# Altium PCB fader2_blind_vias_pcb.PcbDoc (part 3 of 3)
Units mil, origin at the board's own origin, x right, y up, seen from the top; angles counter-clockwise.
Board outline 6700 x 3900 mil, 6 copper layers (TOP, L2, L3, L4, L5, BOT), stack 48.468 mil thick; 207 components, 131 nets, 1413 pads, 920 vias.
Unrouted connection lines stored in the file: 31.
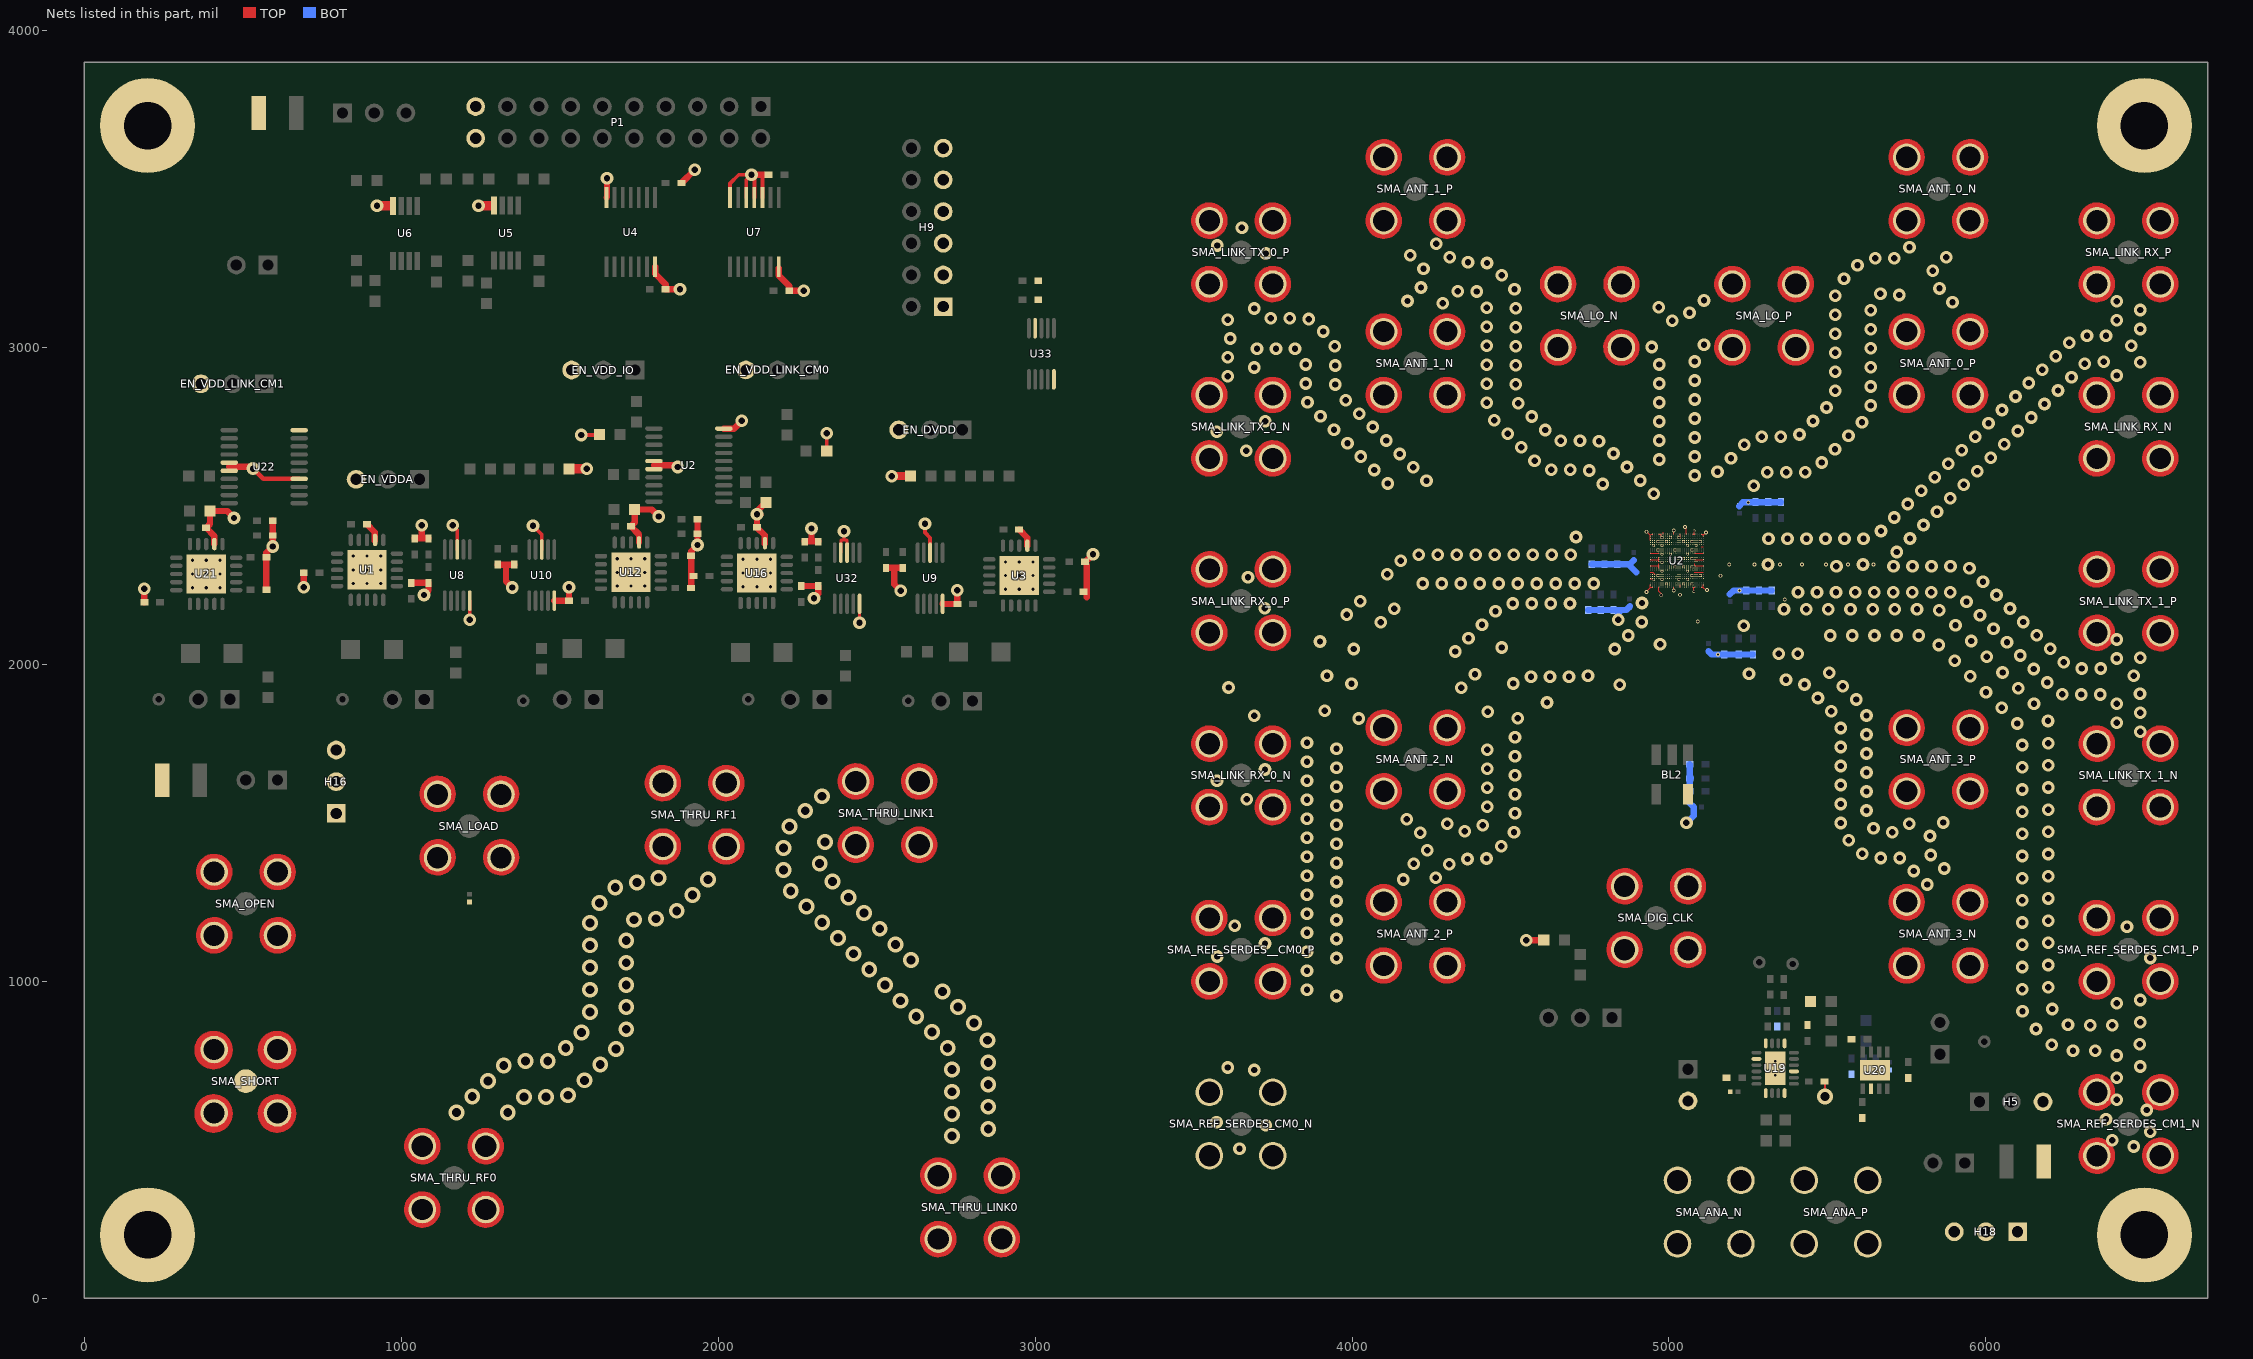
[diagram p7: the nets of this part, all layers, seen from the top]

## Via types
v1: diameter 40, hole 20, TOP to BOT, 478 vias
v2: diameter 40, hole 20, TOP to BOT, tented both sides, 111 vias
v3: diameter 50, hole 28, TOP to BOT, 71 vias
v4: diameter 8, hole 6, TOP to L2, 60 vias
v5: diameter 8, hole 6, L2 to L5, 60 vias
v6: diameter 8, hole 6, L5 to BOT, tented bottom, 53 vias
v7: diameter 20, hole 10, TOP to BOT, 45 vias
v8: diameter 12, hole 7, TOP to BOT, 29 vias
v9: diameter 8, hole 6, L5 to BOT, 7 vias
v10: diameter 20, hole 10, TOP to BOT, tented both sides, 4 vias
v11: diameter 19.68, hole 7.87, TOP to BOT, 2 vias

## Nets (pads, with @x,y where several pads share a name; then routed paths per layer and width w, separated by ;. In a path a pad name is that pad's centre, name@x,y a point inside that pad or via, vN(x,y) a via of type N, cw(c..) or ccw(c..) an arc to the next point about the centre after c; other vN are vias at no path point) (continued)
VSS: BL2.4 C1.2 C2.2 C3.2 C4.2 C5.2 C6.2 C8.2 C10.2 C13.2 C14.2 C17.2 C18.2 C19.2 C20.2 C21.2 C22.2 C23.2 C25.2 C26.2 C29.2 C30.2 C31.2 C32.2 C33.2 C34.2 C35.2 C36.2 C37.2 C38.2 C39.2 C40.2 C43.2 C46.2 C47.2 C48.2 C49.2 C50.2 C51.2 C52.2 C53.2 C62.2 C63.2 C64.2 C65.2 C66.2 C67.2 C69.2 C70.2 C71.2 C72.2 C73.2 C75.2 C76.2 C77.2 C78.2 C86.2 C87.2 C88.2 C89.2 C90.2 C91.2 C92.2 C95.2 C96.2 C98.2 C99.2 C100.2 C102.2 C103.2 C104.2 C105.2 C113.2 C114.2 C115.2 C116.2 C117.2 C118.2 EN_DVDD.3 EN_VDD_IO.3 EN_VDD_LINK_CM0.3 EN_VDD_LINK_CM1.3 EN_VDDA.3 H5.3 H9.1 H9.3 H9.5 H9.7 H9.9 H9.11 H13.2 H16.1 H16.2 H16.3 H18.1 H18.2 H18.3 P1.19 P1.20 pad.0 R1.1 R2.2 R5.1 R6.1 R23.2 R33.2 R40.1 R44.2 R51.2 R72.1 SMA_ANA_N.2 SMA_ANA_N.3 SMA_ANA_N.4 SMA_ANA_N.5 SMA_ANA_P.2 SMA_ANA_P.3 SMA_ANA_P.4 SMA_ANA_P.5 SMA_ANT_0_N.2 SMA_ANT_0_N.3 SMA_ANT_0_N.4 SMA_ANT_0_N.5 SMA_ANT_0_P.2 SMA_ANT_0_P.3 SMA_ANT_0_P.4 SMA_ANT_0_P.5 SMA_ANT_1_N.2 SMA_ANT_1_N.3 SMA_ANT_1_N.4 SMA_ANT_1_N.5 SMA_ANT_1_P.2 SMA_ANT_1_P.3 SMA_ANT_1_P.4 SMA_ANT_1_P.5 SMA_ANT_2_N.2 SMA_ANT_2_N.3 SMA_ANT_2_N.4 SMA_ANT_2_N.5 SMA_ANT_2_P.2 SMA_ANT_2_P.3 SMA_ANT_2_P.4 SMA_ANT_2_P.5 SMA_ANT_3_N.2 SMA_ANT_3_N.3 SMA_ANT_3_N.4 SMA_ANT_3_N.5 SMA_ANT_3_P.2 SMA_ANT_3_P.3 SMA_ANT_3_P.4 SMA_ANT_3_P.5 SMA_DIG_CLK.2 SMA_DIG_CLK.3 SMA_DIG_CLK.4 SMA_DIG_CLK.5 SMA_LINK_RX_0_N.2 SMA_LINK_RX_0_N.3 SMA_LINK_RX_0_N.4 SMA_LINK_RX_0_N.5 SMA_LINK_RX_0_P.2 SMA_LINK_RX_0_P.3 SMA_LINK_RX_0_P.4 SMA_LINK_RX_0_P.5 SMA_LINK_RX_N.2 SMA_LINK_RX_N.3 SMA_LINK_RX_N.4 SMA_LINK_RX_N.5 SMA_LINK_RX_P.2 SMA_LINK_RX_P.3 SMA_LINK_RX_P.4 SMA_LINK_RX_P.5 SMA_LINK_TX_0_N.2 SMA_LINK_TX_0_N.3 SMA_LINK_TX_0_N.4 SMA_LINK_TX_0_N.5 SMA_LINK_TX_0_P.2 SMA_LINK_TX_0_P.3 SMA_LINK_TX_0_P.4 SMA_LINK_TX_0_P.5 SMA_LINK_TX_1_N.2 SMA_LINK_TX_1_N.3 SMA_LINK_TX_1_N.4 SMA_LINK_TX_1_N.5 SMA_LINK_TX_1_P.2 SMA_LINK_TX_1_P.3 SMA_LINK_TX_1_P.4 SMA_LINK_TX_1_P.5 SMA_LO_N.2 SMA_LO_N.3 SMA_LO_N.4 SMA_LO_N.5 SMA_LO_P.2 SMA_LO_P.3 SMA_LO_P.4 SMA_LO_P.5 SMA_LOAD.2 SMA_LOAD.3 SMA_LOAD.4 SMA_LOAD.5 SMA_OPEN.2 SMA_OPEN.3 SMA_OPEN.4 SMA_OPEN.5 SMA_REF_SERDES__CM0_P.2 SMA_REF_SERDES__CM0_P.3 SMA_REF_SERDES__CM0_P.4 SMA_REF_SERDES__CM0_P.5 SMA_REF_SERDES_CM0_N.2 SMA_REF_SERDES_CM0_N.3 SMA_REF_SERDES_CM0_N.4 SMA_REF_SERDES_CM0_N.5 SMA_REF_SERDES_CM1_N.2 SMA_REF_SERDES_CM1_N.3 SMA_REF_SERDES_CM1_N.4 SMA_REF_SERDES_CM1_N.5 SMA_REF_SERDES_CM1_P.2 SMA_REF_SERDES_CM1_P.3 SMA_REF_SERDES_CM1_P.4 SMA_REF_SERDES_CM1_P.5 SMA_SHORT.1 SMA_SHORT.2 SMA_SHORT.3 SMA_SHORT.4 SMA_SHORT.5 SMA_THRU_LINK0.2 SMA_THRU_LINK0.3 SMA_THRU_LINK0.4 SMA_THRU_LINK0.5 SMA_THRU_LINK1.2 SMA_THRU_LINK1.3 SMA_THRU_LINK1.4 SMA_THRU_LINK1.5 SMA_THRU_RF0.2 SMA_THRU_RF0.3 SMA_THRU_RF0.4 SMA_THRU_RF0.5 SMA_THRU_RF1.2 SMA_THRU_RF1.3 SMA_THRU_RF1.4 SMA_THRU_RF1.5 U1.12 U1.21 U2.10 U2.15 U2.16 U2.A2 U2.A7 U2.A10 U2.A13 U2.A16 U2.A19 U2.A22 U2.A25 U2.AA1 U2.AA2 U2.AA3 U2.AA4 U2.AA5 U2.AA6 U2.AA7 U2.AA8 U2.AA9 U2.AA10 U2.AA11 U2.AA14 U2.AA15 U2.AA18 U2.AA19 U2.AA20 U2.AA21 U2.AA22 U2.AA23 U2.AA24 U2.AA25 U2.AB1 U2.AB4 U2.AB5 U2.AB6 U2.AB7 U2.AB8 U2.AB9 U2.AB10 U2.AB11 U2.AB12 U2.AB13 U2.AB14 U2.AB15 U2.AB16 U2.AB17 U2.AB18 U2.AB19 U2.AB20 U2.AB21 U2.AB22 U2.AB23 U2.AB26 U2.AC4 U2.AC5 U2.AC6 U2.AC7 U2.AC8 U2.AC9 U2.AC11 U2.AC12 U2.AC14 U2.AC15 U2.AC17 U2.AC18 U2.AC20 U2.AC21 U2.AC22 U2.AC23 U2.AD4 U2.AD5 U2.AD6 U2.AD7 U2.AD20 U2.AD21 U2.AD22 U2.AD23 U2.AE1 U2.AE4 U2.AE5 U2.AE6 U2.AE7 U2.AE20 U2.AE21 U2.AE22 U2.AE23 U2.AE26 U2.AF2 U2.AF3 U2.AF4 U2.AF5 U2.AF6 U2.AF7 U2.AF10 U2.AF13 U2.AF16 U2.AF19 U2.AF22 U2.AF25 U2.B1 U2.B4 U2.B5 U2.B6 U2.B7 U2.B20 U2.B21 U2.B26 U2.C4 U2.C5 U2.C6 U2.C7 U2.C20 U2.C21 U2.D4 U2.D5 U2.D6 U2.D7 U2.D8 U2.D9 U2.D11 U2.D12 U2.D14 U2.D15 U2.D17 U2.D18 U2.D20 U2.D21 U2.E1 U2.E4 U2.E5 U2.E6 U2.E7 U2.E8 U2.E9 U2.E10 U2.E11 U2.E12 U2.E13 U2.E14 U2.E15 U2.E16 U2.E17 U2.E18 U2.E19 U2.E20 U2.E21 U2.E26 U2.F1 U2.F4 U2.F5 U2.F6 U2.F7 U2.F8 U2.F9 U2.F10 U2.F11 U2.F12 U2.F13 U2.F16 U2.F17 U2.F18 U2.F19 U2.F20 U2.F21 U2.F22 U2.F23 U2.F24 U2.F25 U2.F26 U2.G4 U2.G5 U2.G6 U2.G7 U2.G8 U2.G9 U2.G10 U2.G11 U2.G12 U2.G13 U2.G16 U2.G17 U2.G18 U2.G19 U2.G20 U2.G21 U2.G22 U2.G23 U2.G24 U2.G25 U2.H4 U2.H5 U2.H6 U2.H7 U2.H10 U2.H11 U2.H12 U2.H13 U2.H16 U2.H17 U2.H18 U2.H19 U2.H22 U2.H23 U2.H24 U2.H25 U2.J1 U2.J4 U2.J5 U2.J6 U2.J7 U2.J10 U2.J11 U2.J12 U2.J13 U2.J16 U2.J17 U2.J18 U2.J19 U2.J22 U2.J23 U2.J24 U2.J25 U2.J26 U2.K2 U2.K3 U2.K4 U2.K5 U2.K12 U2.K13 U2.K16 U2.K17 U2.K22 U2.K23 U2.K24 U2.K25 U2.K26 U2.L2 U2.L3 U2.L4 U2.L5 U2.L12 U2.L13 U2.L16 U2.L17 U2.L22 U2.L23 U2.L24 U2.L25 U2.M1 U2.M2 U2.M3 U2.M4 U2.M5 U2.M8 U2.M9 U2.M12 U2.M13 U2.M16 U2.M17 U2.M20 U2.M21 U2.M22 U2.M23 U2.M24 U2.M25 U2.M26 U2.N2 U2.N3 U2.N4 U2.N5 U2.N8 U2.N9 U2.N12 U2.N13 U2.N16 U2.N17 U2.N20 U2.N21 U2.N22 U2.N23 U2.N24 U2.N25 U2.P8 U2.P9 U2.P10 U2.P11 U2.P16 U2.P17 U2.P21 U2.P22 U2.P24 U2.P25 U2.R1 U2.R8 U2.R9 U2.R10 U2.R11 U2.R16 U2.R17 U2.R26 U2.T2 U2.T3 U2.T5 U2.T6 U2.T10 U2.T11 U2.T16 U2.T17 U2.U2 U2.U3 U2.U4 U2.U5 U2.U6 U2.U7 U2.U10 U2.U11 U2.U16 U2.U17 U2.U22 U2.U23 U2.U24 U2.U25 U2.V1 U2.V2 U2.V3 U2.V4 U2.V5 U2.V6 U2.V7 U2.V10 U2.V11 U2.V14 U2.V15 U2.V18 U2.V19 U2.V22 U2.V23 U2.V24 U2.V25 U2.V26 U2.W1 U2.W2 U2.W3 U2.W4 U2.W5 U2.W6 U2.W7 U2.W10 U2.W11 U2.W14 U2.W15 U2.W18 U2.W19 U2.W22 U2.W23 U2.W24 U2.W25 U2.W26 U2.Y2 U2.Y3 U2.Y4 U2.Y5 U2.Y6 U2.Y7 U2.Y8 U2.Y9 U2.Y10 U2.Y11 U2.Y14 U2.Y15 U2.Y18 U2.Y19 U2.Y20 U2.Y21 U2.Y22 U2.Y23 U2.Y24 U2.Y25 U3.12 U3.21 U4.7 U4.14 U5.4 U6.4 U7.3 U7.4 U7.5 U7.7 U7.14 U8.5 U8.8 U9.5 U9.8 U10.5 U10.8 U12.12 U12.21 U16.12 U16.21 U19.3 U19.7 U19.10 U19.12 U19.17 U19.20 U19.21 U20.6 U20.9 U21.12 U21.21 U22.4 U22.10 U22.15 U22.16 U32.5 U32.8 U32.9 U33.5 U33.9 | length 39228.5
  TOP w3: 1265.1,325.06 1265.1,281.91 SMA_THRU_RF0.3@1266.91,280.1 ; 2849.94,385.1 SMA_THRU_LINK0.3@2893.09,385.1 ; 4298.19,1094.96 4298.19,1051.81 SMA_ANT_2_P.3@4300,1050 ; 4298.19,1644.96 4298.19,1601.81 SMA_ANT_2_N.3@4300,1600 ; 4298.19,2894.96 4298.19,2851.81 SMA_ANT_1_N.3@4300,2850 ; 4298.19,3444.96 4298.19,3401.81 SMA_ANT_1_P.3@4300,3400 ; 4848.19,3044.96 4848.19,3001.81 SMA_LO_N.3@4850,3000 ; v8(4928.93,2228.44) 4928.93,2229.97 4941.38,2242.42 ; v8(4929.35,2418.68) 4929.62,2418.68 4941.38,2406.91 ; U2.AF22@4941.38,2270.67 U2.AE22@4948.07,2270.67 ; U2.AF19@4941.38,2290.75 4948.07,2290.75 U2.AD20@4954.77,2284.05 ; U2.AF16@4941.38,2310.83 U2.AB16@4968.15,2310.83 ; U2.AF13@4941.38,2330.9 U2.AB13@4968.15,2330.9 ; U2.AF10@4941.38,2350.98 U2.AB10@4968.15,2350.98 ; U2.AF4@4941.38,2391.14 U2.AF3@4941.38,2397.83 U2.AF2@4941.38,2404.53 4941.38,2406.91 ; U2.AE26@4948.07,2243.9 4942.85,2243.9 4941.38,2242.42 ; U2.AE1@4948.07,2411.22 4945.68,2411.22 4941.38,2406.91 ; U2.AB26@4968.15,2243.9 4968.15,2231 4975.85,2223.31 v8(4975.85,2218.4) ; U2.AB17@4968.15,2304.13 U2.AB16@4968.15,2310.83 ; U2.AB15@4968.15,2317.52 U2.AB16@4968.15,2310.83 ; U2.AB14@4968.15,2324.21 U2.AB13@4968.15,2330.9 ; U2.AB12@4968.15,2337.6 U2.AB13@4968.15,2330.9 ; U2.AB1@4968.15,2411.22 U2.AA1@4974.84,2411.22 U2.AA2@4974.84,2404.53 ; v8(5015.03,2233.22) U2.R26@5015.03,2243.87 ; U2.R1@5015,2411.22 v8(5015.01,2422.69) ; U2.M26@5035.08,2243.89 U2.M25@5035.08,2250.59 ; U2.M3@5035.08,2397.83 U2.M2@5035.08,2404.53 U2.M1@5035.08,2411.22 ; v8(5050.7,2433.46) 5055.16,2429 U2.J1@5055.16,2411.22 ; U2.F26@5075.24,2244.21 5078.59,2244.21 ; U2.F1@5075.24,2411.22 5078.59,2411.22 ; v4@5078.59,2229.56 5078.59,2244.21 ; v4@5079,2421.25 v6(5079,2421) 5079,2411.63 5078.59,2411.22 ; 5079.52,2290.6 5079.67,2290.74 U2.E19@5081.93,2290.74 U2.A19@5108.7,2290.74 ; U2.E26@5081.93,2244.21 5078.59,2244.21 ; U2.E16@5081.93,2310.82 U2.E15@5081.93,2317.52 ; U2.E13@5081.93,2330.9 U2.A13@5108.7,2330.9 ; U2.E10@5081.93,2350.98 U2.A10@5108.7,2350.98 ; U2.E1@5081.93,2411.22 5078.59,2411.22 ; 5083.43,2310.82 U2.A16@5108.7,2310.82 ; U2.B26@5102.01,2243.89 5106.79,2243.89 5108.7,2241.98 ; U2.B7@5102.01,2371.06 U2.A7@5108.7,2371.06 ; U2.B1@5102.01,2411.22 5106.96,2411.22 ; U2.A25@5108.7,2250.59 5108.7,2241.98 ; U2.A2@5108.7,2404.53 5108.7,2409.47 5106.96,2411.22 ; v8(5116.85,2416.59) 5116.85,2416.17 5111.9,2411.22 5106.96,2411.22 ; v8(5120,2235) 5115.68,2235 5108.7,2241.98 ; 5398.19,3044.96 5398.19,3001.81 SMA_LO_P.3@5400,3000 ; 5948.19,1094.96 5948.19,1051.81 SMA_ANT_3_N.3@5950,1050 ; 5948.19,1644.96 5948.19,1601.81 SMA_ANT_3_P.3@5950,1600 ; 5948.19,2894.96 5948.19,2851.81 SMA_ANT_0_P.3@5950,2850 ; 5948.19,3444.96 5948.19,3401.81 SMA_ANT_0_N.3@5950,3400 ; 6548.19,1594.96 6548.19,1551.81 SMA_LINK_TX_1_N.3@6550,1550 ; 6548.19,2143.46 6548.19,2100.31 SMA_LINK_TX_1_P.3@6550,2098.5 ; 6548.19,2694.96 6548.19,2651.81 SMA_LINK_RX_N.3@6550,2650 ; 6548.19,3244.96 6548.19,3201.81 SMA_LINK_RX_P.3@6550,3200 ; 4941.38,2242.42 U2.AF25@4941.38,2250.59 ; 4941.38,2243.9 U2.AF25@4941.38,2250.59 ; 4941.38,2243.9 U2.AF25@4941.38,2250.59 ; 4941.38,2243.9 U2.AF25@4941.38,2250.59 ; 4941.38,2243.9 U2.AF25@4941.38,2250.59 ; 4941.38,2243.9 U2.AF25@4941.38,2250.59 ; 4941.38,2243.9 U2.AF25@4941.38,2250.59
  TOP w5.75: C75.2@5491.05,683.84 5492.05,684.84 v3(5492.05,637)
  TOP w10: v2(1216.31,2141.24) U8.5@1216.31,2201.24 ; U32.9@2387.25,2352.65 U32.9@2387.31,2352.71 2387.31,2392.24 2396.94,2392.24 ; v2(2396.94,2420.61) 2396.94,2392.24 ; 2406.57,2392.24 2396.94,2392.24 ; U32.8@2406.94,2352.65 2406.94,2391.87 ; v2(2446.31,2131.24) U32.5@2446.31,2191.24
  TOP w12: v2(1162.82,2438.83) 1176.99,2424.65 U8.8@1176.99,2362.71 ; v2(1415.82,2437.83) 1443.82,2409.83 U10.8@1443.82,2362.54 ; v2(1567.82,2723.83) 1624.82,2723.83 R6.1@1625.82,2724.83 ; U7.7@2037.64,3473.07 2037.64,3517.05 2065.26,3544.67 v2(2105.26,3544.67) ; U7.5@2088.82,3473.07 2088.82,3528.23 v2(2105.26,3544.67) ; U7.4@2114.41,3473.07 2114.41,3535.52 v2(2105.26,3544.67) ; U7.3@2140,3473.07 2140,3540.26 2144.41,3544.67 ; R40.1@2342.82,2673.83 v2(2342.82,2728.83) ; v2(2652.82,2443.83) 2652.82,2415.83 2668.82,2399.83 U9.8@2668.82,2352.54
  TOP w15: v2(532.82,2617.83) 565.2,2585.44 U22.4@678.05,2585.44
  TOP w20: C114.2@189.82,2195.83 v2(189.82,2238.83) ; U21.12@410.59,2379.8 410.59,2405.05 C96.2@384.82,2430.83 396.82,2442.83 R72.1@396.82,2483.83 450.82,2483.83 v2(472.82,2461.83) ; 457.58,2623.83 532.82,2623.83 v2(532.82,2617.83) ; C113.2@574.82,2235.83 C95.2@574.82,2337.83 574.82,2351.83 v2(594.82,2371.83) C64.2@594.82,2406.83 C63.2@594.82,2452.83 ; v2(692.82,2243.83) C2.2@692.82,2288.83 ; C62.2@892.31,2442.24 917.08,2417.46 U1.12@917.08,2390.24 ; C1.2@1032.31,2257.24 C40.2@1086.31,2257.24 1086.31,2233.24 v2(1072.31,2219.24) ; C46.2@1043.31,2398.24 1064.81,2398.24 ; v2(1064.81,2438.74) 1064.81,2398.24 ; C47.2@1086.31,2398.24 1064.81,2398.24 ; C26.2@1304.82,2314.83 1330.82,2314.83 ; v2(1350.82,2242.83) 1330.82,2262.83 1330.82,2314.83 ; C25.2@1356.82,2314.83 1330.82,2314.83 ; U10.5@1483.19,2201.12 1483.48,2200.83 C31.2@1529.82,2200.83 v2(1529.82,2243.83) ; U4.7@1647.64,3473.07 1649.41,3474.84 v2(1649.41,3533.82) ; U12.12@1750.59,2384.8 1750.59,2410.05 C43.2@1724.82,2435.83 1736.82,2447.83 R5.1@1736.82,2488.83 1790.82,2488.83 v2(1812.82,2466.83) ; 1797.58,2628.83 1872.82,2628.83 v2(1872.82,2622.83) ; U4.14@1801.18,3254.57 1801.18,3232.05 1834.41,3198.82 C14.2@1834.41,3183.82 v2(1879.98,3183.82) ; C13.2@1884.41,3518.82 v2(1926.41,3560.82) ; C29.2@1914.82,2240.83 C37.2@1914.82,2342.83 1914.82,2356.83 v2(1934.82,2376.83) C4.2@1934.82,2411.83 C3.2@1934.82,2457.83 ; U2.10@2018.05,2743.98 2049.98,2743.98 v2(2074.82,2768.83) ; v2(2105.26,3544.67) 2144.41,3544.67 ; C39.2@2122.31,2432.24 C39.2@2122.82,2431.72 ; v2@2132.82,2471.8 v2@2130.79,2473.83 ; U16.12@2147.08,2380.24 2147.08,2407.46 C39.2@2122.82,2431.72 ; R1.1@2150.82,2510.83 2122.31,2482.31 v2@2130.79,2473.83 ; U7.14@2191.18,3249.57 2191.18,3227.05 2224.41,3193.82 C66.2@2224.41,3178.82 v2(2269.98,3178.82) ; C32.2@2262.31,2247.24 C38.2@2316.31,2247.24 2316.31,2223.24 v2(2302.31,2209.24) ; C70.2@2273.31,2388.24 2294.81,2388.24 ; v2(2294.81,2428.74) 2294.81,2388.24 ; C71.2@2316.31,2388.24 2294.81,2388.24 ; C78.2@2529.82,2304.83 2555.82,2304.83 ; v2(2575.82,2232.83) 2555.82,2252.83 2555.82,2304.83 ; C69.2@2581.82,2304.83 2555.82,2304.83 ; U9.5@2708.19,2191.12 2708.48,2190.83 C104.2@2754.82,2190.83 v2(2754.82,2233.83) ; C102.2@2949.82,2425.83 2975.59,2400.05 U3.12@2975.59,2374.8 ; 3162.82,2211.83 C23.2@3162.82,2313.83 ; C23.2@3162.82,2327.83 v2(3182.82,2347.83) ; v2@4563,1130 R2.2@4605,1130 ; C39.2@2122.82,2431.72 v2(2122.82,2473.83) v2@2130.79,2473.83
  TOP w25: 1311.57,274.6 cw(c1266.91,280.1) 1265.1,325.06 cw(c1266.91,280.1) 1311.91,280.1 ; 1311.57,474.6 cw(c1266.91,480.1) 1264.93,435.14 cw(c1266.91,480.1) 1311.91,480.1 ; v2(2547.82,2593.83) R23.2@2606.82,2593.83 ; 2694.9,431.91 ccw(c2694.9,386.91) 2739.86,384.93 ccw(c2694.9,386.91) 2700.4,431.57 ; 2894.9,431.91 ccw(c2894.9,386.91) 2849.94,385.1 ccw(c2894.9,386.91) 2900.4,431.57 ; 4344.66,1044.5 cw(c4300,1050) 4298.19,1094.96 cw(c4300,1050) 4345,1050 ; 4344.66,1244.5 cw(c4300,1250) 4298.02,1205.04 cw(c4300,1250) 4345,1250 ; 4344.66,1594.5 cw(c4300,1600) 4298.19,1644.96 cw(c4300,1600) 4345,1600 ; 4344.66,1794.5 cw(c4300,1800) 4298.02,1755.04 cw(c4300,1800) 4345,1800 ; 4344.66,2844.5 cw(c4300,2850) 4298.19,2894.96 cw(c4300,2850) 4345,2850 ; 4344.66,3044.5 cw(c4300,3050) 4298.02,3005.04 cw(c4300,3050) 4345,3050 ; 4344.66,3394.5 cw(c4300,3400) 4298.19,3444.96 cw(c4300,3400) 4345,3400 ; 4344.66,3594.5 cw(c4300,3600) 4298.02,3555.04 cw(c4300,3600) 4345,3600 ; 4894.66,2994.5 cw(c4850,3000) 4848.19,3044.96 cw(c4850,3000) 4895,3000 ; 4894.66,3194.5 cw(c4850,3200) 4848.02,3155.04 cw(c4850,3200) 4895,3200 ; 5444.66,2994.5 cw(c5400,3000) 5398.19,3044.96 cw(c5400,3000) 5445,3000 ; 5444.66,3194.5 cw(c5400,3200) 5398.02,3155.04 cw(c5400,3200) 5445,3200 ; 5994.66,1044.5 cw(c5950,1050) 5948.19,1094.96 cw(c5950,1050) 5995,1050 ; 5994.66,1244.5 cw(c5950,1250) 5948.02,1205.04 cw(c5950,1250) 5995,1250 ; 5994.66,1594.5 cw(c5950,1600) 5948.19,1644.96 cw(c5950,1600) 5995,1600 ; 5994.66,1794.5 cw(c5950,1800) 5948.02,1755.04 cw(c5950,1800) 5995,1800 ; 5994.66,2844.5 cw(c5950,2850) 5948.19,2894.96 cw(c5950,2850) 5995,2850 ; 5994.66,3044.5 cw(c5950,3050) 5948.02,3005.04 cw(c5950,3050) 5995,3050 ; 5994.66,3394.5 cw(c5950,3400) 5948.19,3444.96 cw(c5950,3400) 5995,3400 ; 5994.66,3594.5 cw(c5950,3600) 5948.02,3555.04 cw(c5950,3600) 5995,3600 ; 6594.66,1544.5 cw(c6550,1550) 6548.19,1594.96 cw(c6550,1550) 6595,1550 ; 6594.66,2093 cw(c6550,2098.5) 6548.19,2143.46 cw(c6550,2098.5) 6595,2098.5 ; 6594.66,2644.5 cw(c6550,2650) 6548.19,2694.96 cw(c6550,2650) 6595,2650 ; 6594.66,3194.5 cw(c6550,3200) 6548.19,3244.96 cw(c6550,3200) 6595,3200 ; 6594.66,3394.5 cw(c6550,3400) 6548.02,3355.04 cw(c6550,3400) 6595,3400 ; 455.31,1145.14 ccw(c410.31,1145.14) 455.31,1145.14 ; 455.31,1345.14 ccw(c410.31,1345.14) 455.31,1345.14 ; 456.73,583.14 ccw(c408.31,583.14) 456.73,583.14 ; 456.73,783.14 ccw(c408.31,783.14) 456.73,783.14 ; 655.31,1145.14 ccw(c610.31,1145.14) 655.31,1145.14 ; 655.31,1345.14 ccw(c610.31,1345.14) 655.31,1345.14 ; 656.73,583.14 ccw(c608.31,583.14) 656.73,583.14 ; 656.73,783.14 ccw(c608.31,783.14) 656.73,783.14 ; 1111.57,274.6 ccw(c1066.91,280.1) 1111.91,280.1 ccw(c1066.91,280.1) 1111.57,274.6 ; 1111.91,480.1 ccw(c1066.91,480.1) 1111.91,480.1 ; 1160.31,1391.45 ccw(c1115.31,1391.45) 1160.31,1391.45 ; 1160.31,1591.45 ccw(c1115.31,1591.45) 1160.31,1591.45 ; 1360.31,1391.45 ccw(c1315.31,1391.45) 1360.31,1391.45 ; 1360.31,1591.45 ccw(c1315.31,1591.45) 1360.31,1591.45 ; 1829.92,1380.78 ccw(c1825.91,1425.6) 1870.57,1420.1 ccw(c1825.91,1425.6) 1870.91,1425.6 ccw(c1825.91,1425.6) 1829.92,1470.42 ccw(c1825.91,1425.6) 1829.92,1380.78 ; 1829.92,1580.78 cw(c1825.91,1625.6) 1829.92,1670.42 cw(c1825.91,1625.6) 1870.91,1625.6 cw(c1825.91,1625.6) 1829.92,1580.78 ; 1981.25,1420.1 cw(c2025.91,1425.6) 2070.91,1425.6 cw(c2025.91,1425.6) 1981.25,1420.1 ; 2070.91,1625.6 ccw(c2025.91,1625.6) 2070.91,1625.6 ; 2389.58,1434.92 ccw(c2434.4,1430.91) 2479.22,1434.92 ccw(c2434.4,1430.91) 2434.4,1475.91 ccw(c2434.4,1430.91) 2389.58,1434.92 ; 2479.4,1630.91 ccw(c2434.4,1630.91) 2479.4,1630.91 ; 2589.58,1434.92 ccw(c2634.4,1430.91) 2679.22,1434.92 ccw(c2634.4,1430.91) 2639.9,1475.57 ccw(c2634.4,1430.91) 2634.4,1475.91 ccw(c2634.4,1430.91) 2589.58,1434.92 ; 2634.4,1675.91 cw(c2634.4,1630.91) 2639.9,1586.25 cw(c2634.4,1630.91) 2634.4,1675.91 ; 2739.9,186.91 ccw(c2694.9,186.91) 2739.9,186.91 ; 2894.9,231.91 ccw(c2894.9,186.91) 2900.4,231.57 ccw(c2894.9,186.91) 2894.9,231.91 ; 3595,1000 ccw(c3550,1000) 3595,1000 ; 3595,1200 ccw(c3550,1200) 3595,1200 ; 3595,1550 ccw(c3550,1550) 3595,1550 ; 3595,1750 ccw(c3550,1750) 3595,1750 ; 3595,2100 ccw(c3550,2100) 3595,2100 ; 3595,2300 ccw(c3550,2300) 3595,2300 ; 3595,2650 ccw(c3550,2650) 3595,2650 ; 3595,2850 ccw(c3550,2850) 3595,2850 ; 3595,3200 ccw(c3550,3200) 3595,3200 ; 3595,3400 ccw(c3550,3400) 3595,3400 ; 3795,1000 ccw(c3750,1000) 3795,1000 ; 3795,1200 ccw(c3750,1200) 3795,1200 ; 3795,1550 ccw(c3750,1550) 3795,1550 ; 3795,1750 ccw(c3750,1750) 3795,1750 ; 3795,2100 ccw(c3750,2100) 3795,2100 ; 3795,2300 ccw(c3750,2300) 3795,2300 ; 3795,2650 ccw(c3750,2650) 3795,2650 ; 3795,2850 ccw(c3750,2850) 3795,2850 ; 3795,3200 ccw(c3750,3200) 3795,3200 ; 3795,3400 ccw(c3750,3400) 3795,3400 ; 4144.66,1044.5 ccw(c4100,1050) 4145,1050 ccw(c4100,1050) 4144.66,1044.5 ; 4144.66,1594.5 ccw(c4100,1600) 4145,1600 ccw(c4100,1600) 4144.66,1594.5 ; 4144.66,2844.5 ccw(c4100,2850) 4145,2850 ccw(c4100,2850) 4144.66,2844.5 ; 4144.66,3394.5 ccw(c4100,3400) 4145,3400 ccw(c4100,3400) 4144.66,3394.5 ; 4145,1250 ccw(c4100,1250) 4145,1250 ; 4145,1800 ccw(c4100,1800) 4145,1800 ; 4145,3050 ccw(c4100,3050) 4145,3050 ; 4145,3600 ccw(c4100,3600) 4145,3600 ; 4694.66,2994.5 ccw(c4650,3000) 4695,3000 ccw(c4650,3000) 4694.66,2994.5 ; 4695,3200 ccw(c4650,3200) 4695,3200 ; 4905,1100 ccw(c4860,1100) 4905,1100 ; 4905,1300 ccw(c4860,1300) 4905,1300 ; 5105,1100 ccw(c5060,1100) 5105,1100 ; 5105,1300 ccw(c5060,1300) 5105,1300 ; 5244.66,2994.5 ccw(c5200,3000) 5245,3000 ccw(c5200,3000) 5244.66,2994.5 ; 5245,3200 ccw(c5200,3200) 5245,3200 ; 5794.66,1044.5 ccw(c5750,1050) 5795,1050 ccw(c5750,1050) 5794.66,1044.5 ; 5794.66,1594.5 ccw(c5750,1600) 5795,1600 ccw(c5750,1600) 5794.66,1594.5 ; 5794.66,2844.5 ccw(c5750,2850) 5795,2850 ccw(c5750,2850) 5794.66,2844.5 ; 5794.66,3394.5 ccw(c5750,3400) 5795,3400 ccw(c5750,3400) 5794.66,3394.5 ; 5795,1250 ccw(c5750,1250) 5795,1250 ; 5795,1800 ccw(c5750,1800) 5795,1800 ; 5795,3050 ccw(c5750,3050) 5795,3050 ; 5795,3600 ccw(c5750,3600) 5795,3600 ; 6395,450 ccw(c6350,450) 6395,450 ; 6395,650 ccw(c6350,650) 6395,650 ; 6395,1000 ccw(c6350,1000) 6395,1000 ; 6395,1200 ccw(c6350,1200) 6395,1200 ; 6395,1550 ccw(c6350,1550) 6395,1550 ; 6395,1750 ccw(c6350,1750) 6395,1750 ; 6395,2100 ccw(c6350,2100) 6395,2100 ; 6395,2300 ccw(c6350,2300) 6395,2300 ; 6395,2650 ccw(c6350,2650) 6395,2650 ; 6395,2850 ccw(c6350,2850) 6395,2850 ; 6395,3200 ccw(c6350,3200) 6395,3200 ; 6395,3400 ccw(c6350,3400) 6395,3400 ; 6595,450 ccw(c6550,450) 6595,450 ; 6595,650 ccw(c6550,650) 6595,650 ; 6595,1000 ccw(c6550,1000) 6595,1000 ; 6595,1200 ccw(c6550,1200) 6595,1200 ; 6595,1750 ccw(c6550,1750) 6595,1750 ; 6595,2300 ccw(c6550,2300) 6595,2300 ; 6595,2850 ccw(c6550,2850) 6595,2850
  TOP w30: v2(923.94,3447.35) U6.4@965.33,3447.35 ; v2(1243.94,3447.35) U5.4@1285.33,3447.35 ; R33.2@1529.95,2616.97 v2(1585.95,2616.97)
  BOT w20: C19.2@4744.84,2171.78 4864.9,2171.78 C22.2@4876.84,2183.72 ; C48.2@4756.57,2316.53 4876.63,2316.53 C51.2@4888.57,2328.47 ; v1(4839.84,2141.22) 4839.84,2161.22 4849.84,2171.22 ; 4876.63,2311.33 4896.65,2291.3 ; v1(5055,1500) 5078,1523 C100.2@5078,1550 5065.5,1562.5 C98.2@5065.5,1600 C30.2@5065.5,1640 C99.2@5065.5,1685 ; C30.2@5068,1640 C30.2@5068.63,1640.63 ; C118.2@5124.84,2041.22 5134.84,2031.22 v8(5154.84,2031.22) C117.2@5174.84,2031.22 ; C117.2@5174.93,2031.14 C117.2@5174.84,2031.22 ; C103.2@5191.9,2221.22 5203.84,2233.16 v8(5222.12,2233.16) C34.2@5323.9,2233.16 ; C6.2@5221.18,2499.28 5233.12,2511.22 v8(5249.84,2511.22) C52.2@5353.18,2511.22 ; C115.2@5265.26,2031.14 5265.18,2031.22 C116.2@5219.84,2031.22 C117.2@5174.84,2031.22
  other v1: 3645.13,472.18 6466.04,478.91 6398.77,498.24 6518.53,525.22 3727.82,545.86 3572.21,555.54 6378.71,565.31 6507.71,594.37 6413.07,626.29 6413.07,696.29 3691.97,720.28 3608.03,728.48 6486.93,731.22 6413.07,766.29 6274.65,781.07 6344.65,781.07 6207.37,800.4 6484.87,801.19 6157.88,849.9 6328.86,861.93 6398.86,861.93 6258.88,863.34 6486.93,871.16 6115.38,905.52 6209.38,912.84 6413.07,930.47 6486.93,941.16 3950.97,953.72 3858.03,973.14 6115.07,975.52 6196.93,981.73 3858.03,1033.14 6115.07,1045.52 6196.93,1051.73 3950.97,1073.72 6517.98,1073.89 3575.16,1078.64 3858.03,1093.14 6115.07,1115.52 3725.33,1119.55 6196.93,1121.73 3950.97,1133.72 3858.03,1153.14 6445.11,1172.79 3629.54,1175.09 6115.07,1185.52 6196.93,1191.73 3950.97,1193.72 3858.03,1213.14 3950.97,1253.72 6115.07,1255.52 6196.93,1261.73 3858.03,1273.14 5814.45,1305.49 3950.97,1313.72 4161.62,1321.41 6115.07,1325.52 4264.33,1327.36 6196.93,1331.73 3858.03,1333.14 5772.16,1348.05 5868.36,1356.29 4306.76,1369.79 4195.14,1371.17 3950.97,1373.72 4364.5,1386.1 4424.48,1387.75 5668.42,1389.13 5728.42,1389.13 3858.03,1393.14 6115.07,1395.52 5825.93,1398.72 6196.93,1401.73 5610.04,1402.96 4237.57,1413.6 4470.47,1426.28 3950.97,1433.72 5567.61,1445.38 3858.03,1453.14 5823.31,1458.66 6115.07,1465.52 4214.85,1469.13 4510.84,1470.67 5704.23,1470.87 6196.93,1471.73 4355.56,1473.9 5645.49,1483.1 4412.59,1492.56 3950.97,1493.72 4300.13,1496.85 5757.9,1497.69 5541.56,1499.43 5865.74,1501.09 4172.53,1511.67 3858.03,1513.14 4514.37,1530.57 6115.07,1535.52 5623.3,1538.85 6196.93,1541.73 4426.58,1550.9 3950.97,1553.72 5541.56,1559.43 3858.03,1573.14 3667.66,1574.16 4514.37,1590.57 5623.3,1598.85 6115.07,1605.52 4426.58,1610.9 6196.93,1611.73 3950.97,1613.72 5541.56,1619.43 3573.94,1633.16 3858.03,1633.14 4514.37,1650.57 5623.3,1658.85 3725.6,1668.53 4426.58,1670.9 3950.97,1673.72 6115.07,1675.52 5541.56,1679.43 6196.93,1681.73 3858.03,1693.14 4514.37,1710.57 5623.3,1718.85 4426.58,1730.9 3950.97,1733.72 5541.56,1739.43 6115.07,1745.52 6196.93,1751.73 3858.03,1753.14 4514.37,1770.57 5623.3,1778.85 6486.93,1787.71 5541.56,1799.43 6099.1,1813.68 6413.07,1816.2 6196.06,1821.72 4020.85,1829.5 4522.97,1829.95 3691.97,1838.21 5623.3,1838.85 6486.93,1847.71 4427.86,1850.89 5512.33,1851.83 3913.73,1854.08 6049.61,1863.17 6151.51,1875.71 6413.07,1876.2 4615,1880 5590.6,1889.16 5469.9,1894.25 6300.54,1905.18 6360.54,1905.18 6240.54,1905.91 6485.91,1907.7 6000.11,1912.67 6102.01,1925.21 3610.55,1927.37 4345.01,1926.86 5548.17,1931.58 4844.66,1936.16 5427.47,1936.68 3998.58,1938.93 4508.47,1939.6 6193.49,1943.13 5369.42,1951.86 4564.54,1960.95 4624.54,1960.95 4684.54,1960.95 5950.61,1962.17 3921.1,1963.75 4744.47,1963.97 6466.79,1964.57 4388.03,1968.68 5252.37,1970.41 5505.75,1974.01 6052.51,1974.71 6151.06,1985.56 6302.11,1986.93 6362.11,1986.93 6245.47,2006.75 5901.11,2011.67 6413.07,2018.58 6486.93,2021.1 6003.01,2024.21 6108.63,2027.99 5345.83,2033.6 5405.83,2033.6 4325.26,2040.61 4005.96,2048.6 4829.32,2048.82 6203.05,2049.17 4472.89,2053.53 5851.62,2061.16 4971.94,2063.44 6066.21,2070.41 3899.01,2072.37 5953.52,2073.7 6413.07,2078.58 4367.68,2083.04 4871.74,2091.24 5508.33,2091.07 5578.33,2091.07 5648.33,2091.07 5718.33,2091.07 5788.33,2091.07 6160.62,2091.6 6023.78,2112.84 5235.61,2122.17 5904.02,2123.2 4410.11,2125.46 4090.81,2133.46 4914.17,2133.67 6118.2,2134.02 5981.35,2155.27 3983.87,2157.22 4452.54,2167.89 5852.66,2170.76 5362.73,2173.93 5432.73,2173.93 5502.73,2173.93 5572.73,2173.93 5642.73,2173.93 5712.73,2173.93 5782.73,2173.93 4133.24,2175.88 3724.45,2177.16 6075.77,2176.45 4507.49,2191.97 4567.49,2191.97 4627.49,2191.97 4687.49,2191.97 4914.81,2193.67 5938.93,2197.69 4026.29,2199.65 6033.34,2218.88 5407.19,2228.07 5467.19,2228.07 5527.19,2228.07 5587.19,2228.07 5647.19,2228.07 5707.19,2228.07 5767.19,2228.07 5827.19,2228.07 5887.19,2228.07 4222.77,2255.47 4282.77,2255.47 4342.77,2255.47 4402.77,2255.47 4462.77,2255.47 4522.77,2255.47 4582.77,2255.47 4642.77,2255.47 4702.77,2255.47 4762.77,2255.47 5990.92,2261.3 3671.99,2274.68 4111.14,2284.5 5947.89,2303.12 5528.26,2309.82 5708.26,2309.82 5768.26,2309.82 5828.26,2309.82 5888.26,2309.82 5312.23,2315.1 5612.23,2315.1 4153.57,2326.92 4210.42,2346.1 4270.42,2346.1 4330.42,2346.1 4390.42,2346.1 4450.42,2346.1 4510.42,2346.1 4570.42,2346.1 4630.42,2346.1 4690.42,2346.1 5718.2,2354.83 5313.88,2396.84 5373.88,2396.84 5433.88,2396.84 5493.88,2396.84 5553.88,2396.84 5613.88,2396.84 5760.63,2397.25 4706.68,2401.96 5668.79,2421.01 5803.06,2439.68 5711.22,2463.44 5845.48,2482.11 5753.65,2505.87 5887.91,2524.53 4952.2,2538.06 5796.07,2548.29 5267.37,2563.96 5930.34,2566.96 4790.99,2569.41 4112.8,2570.85 4235.17,2579.12 4909.78,2580.48 5838.5,2590.72 5081,2595.87 5309.91,2606.27 5369.91,2606.27 5429.91,2606.33 5153.12,2608.11 5972.76,2609.38 4748.56,2611.83 4070.37,2613.28 4628.61,2614.19 4688.61,2614.19 4192.74,2621.54 4867.35,2622.91 5880.92,2633.15 5481.59,2636.81 4575.99,2643.03 4969,2646.35 5195.55,2650.54 6015.19,2651.81 4027.94,2655.7 5081,2655.87 4150.32,2663.97 4824.92,2665.34 3666.34,2673.81 5923.35,2675.57 5524.01,2679.24 4533.56,2685.46 5237.97,2692.96 6057.62,2694.24 3985.52,2698.13 4778.99,2703.94 4107.89,2706.4 4659.03,2706.02 4719.03,2706.02 4969,2706.35 5081,2715.87 5292.37,2718.27 5352.37,2718.27 5965.78,2718 5566.44,2721.67 5411.93,2725.55 4491.14,2727.88 3573.62,2734.38 6100.04,2736.66 4609.3,2739.59 3943.09,2740.56 4065.46,2748.82 6008.2,2760.42 5608.87,2764.09 4969,2766.35 3725.98,2767.12 5454.36,2767.97 4448.71,2770.31 5081,2775.87 6142.47,2779.09 4566.87,2782.01 3900.67,2782.98 4023.04,2791.25 6050.63,2802.85 5496.78,2810.4 5637.05,2817.06 6184.9,2821.52 4424.73,2825.31 4524.44,2824.44 4969,2826.35 3859.51,2826.65 3980.61,2833.68 5081,2835.87 6093.06,2845.28 5525.05,2863.32 6227.32,2863.94 5637.05,2877.06 3946.9,2883.31 4516.56,2883.92 4424.73,2885.31 3854.03,2886.4 4969,2886.35 6135.48,2887.7 5081,2895.87 6269.75,2906.37 3608.03,2908.72 6413.07,2911.6 5525.05,2923.32 6177.91,2930.13 3691.97,2936.55 5637.05,2937.06 3946.9,2943.31 4516.56,2943.92 4424.73,2945.31 3854.03,2946.4 4969,2946.35 6312.17,2948.8 6486.62,2953.07 6371.83,2955.18 5081,2955.87 3608.03,2968.72 6220.34,2972.56 5525.05,2983.32 3700.32,2995.97 3760.32,2996.03 3820.32,2996.03 5637.05,2997.06 4945.77,3001.67 3945.82,3003.3 4516.56,3003.92 4424.73,3005.31 6458.05,3005.83 5110.62,3008.05 6262.76,3014.98 3615.4,3028.27 6318.61,3036.93 6378.61,3036.93 5525.05,3043.32 3908.82,3050.54 5637.05,3057.06 6486.93,3058.42 4516.56,3063.92 4424.73,3065.31 5010.17,3084.5 6413.07,3086.04 3608.06,3087.81 3863.19,3089.5 3743.24,3091.97 3803.24,3091.97 5525.05,3103.32 5064.75,3109.42 5637.05,3117.06 6486.93,3118.42 3691.97,3123.13 4516.56,3123.92 4424.73,3125.31 4967.75,3126.92 4286.68,3139.51 5894.61,3142.69 6413.07,3146.04 4175.07,3146.61 5110.36,3148.41 5525.05,3163.32 5726.98,3165.45 5667.09,3169 4333.59,3176.92 4393.59,3176.59 4512.38,3183.77 5853.39,3186.28 4217.49,3189.04 5552.1,3216.88 4471.94,3228.1 5832.02,3242.35 4225.64,3248.48 5594.53,3259.31 4426,3266.69 4366.04,3268.75 5650.47,3281 5710.47,3281 4308.18,3284.65 5874.45,3284.78 4183.22,3290.91 3727.82,3296.53 5758.88,3316.45 3575.2,3321.53 4265.76,3327.07 3652.62,3377.82
  other v2: 4550,1130
  other v3: 2738.15,511.63 2852.34,534.41 2738.15,581.63 1174.99,586.8 1336.33,586.65 2852.34,604.41 1387.21,634.72 1457.21,634.72 1224.49,636.3 1526.95,640.83 2738.15,651.63 2852.34,674.41 1273.98,685.8 1578.85,687.79 2738.15,721.63 1323.82,734.96 1628.35,737.29 2852.34,744.41 1392.41,748.92 1462.41,748.92 1677.85,786.79 1519.29,789.73 2724.31,790.25 2850.46,814.38 1568.78,839.22 2674.81,839.75 1710.12,848.91 2806.89,869.17 2625.31,889.24 1595.92,903.75 1710.12,918.91 2757.39,918.67 2575.82,938.74 2707.89,968.16 1595.92,973.75 2526.32,988.24 1710.12,988.91 2476.82,1037.74 1595.92,1043.75 1710.12,1058.91 2608.9,1067.16 2427.32,1087.23 1595.92,1113.75 2559.4,1116.66 1710.12,1128.91 2377.83,1136.73 2509.9,1166.15 1595.92,1183.75 2328.33,1186.23 1734.44,1194.54 1804.38,1197.45 2460.41,1215.65 1869.71,1222.6 2278.83,1235.73 1625.56,1247.16 2410.91,1265.15 1919.21,1272.09 2229.34,1285.22 1675.29,1296.43 1743.62,1311.64 2361.41,1314.65 1968.38,1321.91 1812.04,1326.42 2206.25,1351.31 2320.44,1371.4 2206.25,1421.31 2337.48,1439.3 2225.34,1488.65 2274.84,1538.15 2327.77,1583.96
  other v4: 5078.5,2229.5 4991.5,2254 5045,2254 5072,2254 4951.5,2267.5 4978,2267.5 5031.5,2267.5 5058.5,2267.5 4965,2280.5 5072,2280.5 5098.5,2280.5 4978,2294 5058.5,2294 5018.5,2307.5 5045,2307.5 5072,2307.5 4978,2321 5045,2334.5 5072,2334.5 4978,2347.5 5005,2347.5 5058.5,2347.5 4965,2361 5018.5,2361 5072,2361 4951.5,2374.5 4978,2374.5 5058.5,2374.5 5085.5,2374.5 4965,2388 4991.5,2388 5045,2388 5072,2388 5098.5,2388 4978,2401 5005,2401 5031.5,2401 5079,2421
  other v5: 5078.5,2229.5 4991.5,2254 5045,2254 5072,2254 4951.5,2267.5 4978,2267.5 5031.5,2267.5 5058.5,2267.5 4965,2280.5 5072,2280.5 5098.5,2280.5 4978,2294 5058.5,2294 5018.5,2307.5 5045,2307.5 5072,2307.5 4978,2321 5045,2334.5 5072,2334.5 4978,2347.5 5005,2347.5 5058.5,2347.5 4965,2361 5018.5,2361 5072,2361 4951.5,2374.5 4978,2374.5 5058.5,2374.5 5085.5,2374.5 4965,2388 4991.5,2388 5045,2388 5072,2388 5098.5,2388 4978,2401 5005,2401 5031.5,2401 5079,2421
  other v6: 5078.5,2229.5 4991.5,2254 5045,2254 5072,2254 4951.5,2267.5 4978,2267.5 5058.5,2267.5 4965,2280.5 5072,2280.5 5098.5,2280.5 4978,2294 5058.5,2294 5018.5,2307.5 5045,2307.5 5072,2307.5 4978,2321 5045,2334.5 5072,2334.5 4978,2347.5 5005,2347.5 5058.5,2347.5 4965,2361 5018.5,2361 5072,2361 4978,2374.5 5058.5,2374.5 5085.5,2374.5 4965,2388 4991.5,2388 5045,2388 5072,2388 5098.5,2388
  other v7: 2906.69,2237.01 2950,2237.01 2993.31,2237.01 341.69,2242.01 385,2242.01 428.31,2242.01 2079,2244.93 2122.31,2244.93 2165.61,2244.93 1681.69,2247.01 1725,2247.01 1768.31,2247.01 849,2254.93 892.31,2254.93 935.61,2254.93 2906.69,2280.31 2950,2280.31 2993.31,2280.31 341.69,2285.31 385,2285.31 428.31,2285.31 2079,2288.24 2122.31,2288.24 2165.61,2288.24 1681.69,2290.31 1725,2290.31 1768.31,2290.31 849,2298.24 892.31,2298.24 935.61,2298.24 2906.69,2323.62 2950,2323.62 2993.31,2323.62 341.69,2328.62 385,2328.62 428.31,2328.62 2079,2331.54 2122.31,2331.54 2165.61,2331.54 1681.69,2333.62 1725,2333.62 1768.31,2333.62 849,2341.54 892.31,2341.54 935.61,2341.54
  other v8: 5091,2135 5365,2205 5035,2220 5162.46,2279.5 5190,2315 5270,2315 5350,2315 5420,2315 5495,2315 5565,2315 5645,2315
  other v9: 5031.5,2267.5 4951.5,2374.5 4978,2401 5005,2401 5031.5,2401
  other v11: 5335.05,704.19 5335.05,747.5
Y1: U2.Y1 | length 5.9
  TOP w3: U2.Y1@4981.54,2411.22 4981.54,2417.11
pads on no net: H9.10 H19.3 P1.3 P1.5 P1.7 P1.9 P1.11 P1.13 P1.14 SMA_OPEN.1 U1.2 U1.3 U1.4 U1.9 U1.13 U1.14 U1.17 U2.AD14 U2.AD15 U2.AD17 U2.AD18 U2.AE14 U2.AE15 U2.AE17 U2.AE18 U2.B17 U2.B18 U2.C17 U2.C18 U3.2 U3.3 U3.4 U3.9 U3.13 U3.14 U3.17 U4.6 U4.9 U7.6 U7.8 U7.9 U7.10 U7.11 U8.1 U8.4 U9.1 U9.4 U10.1 U10.4 U12.2 U12.3 U12.4 U12.9 U12.13 U12.14 U12.17 U16.2 U16.3 U16.4 U16.9 U16.13 U16.14 U16.17 U19.4 U19.13 U19.14 U20.7 U21.2 U21.3 U21.4 U21.9 U21.13 U21.14 U21.17 U22.1 U22.2 U22.3 U22.6 U22.7 U22.8 U22.11 U22.12 U22.13 U32.1 U32.4 U33.1 U33.4
copper on no net: | length 41.3
  TOP w20: 932.82,2084.14 932.82,2097.18 952.82,2117.18
  other v5: 5098.5,2300.5
  other v6: 5098.5,2300.5

## Polygon pours and split planes (outlines as drawn)
VSS on BOT "BOT-GND" (solid, remove dead copper, pour order 20): 0,0 6669,0 6669,3900 0,3900
VSS on TOP "TOP-GND" (solid, remove dead copper, pour order 24): 39.37,0 6650,0 6650,3900 39.37,3900
VSS on L5 "L5" (solid, remove dead copper, pour order 34): 0,0 6667,0 6667,3900 0,3900
VSS on L2 "L2" (solid, remove dead copper, pour order 32): 0,0 6700,0 6700,3900 0,3900
VDDA on L3 (split plane): 3470,2435 3470.12,2434.41 3470.45,2433.92 3470.94,2433.59 3471.53,2433.47 5111.2,2433.47 5111.2,2391.68 4911.57,2391.68 4910.98,2391.57 4910.49,2391.24 4910.15,2390.74 4910.04,2390.16 4910.04,2273.8 4910.15,2273.21 4910.49,2272.72 4910.98,2272.39 4911.57,2272.27 5114.15,2272.27 5114.15,2232.81 3471.53,2232.81 3470.94,2232.69 3470.45,2232.36 3470.12,2231.87 3470,2231.28 3470,1936.53 1396.53,1936.53 1396.53,2023.47 3235,2023.47 3235.59,2023.59 3236.08,2023.92 3236.41,2024.41 3236.53,2025 3236.53,2850 3236.41,2850.59 3236.08,2851.08 3235.59,2851.41 3235,2851.53 1663.06,2851.53 1663.06,3218.47 1840,3218.47 1840,3030 1840.12,3029.41 1840.45,3028.92 1840.94,3028.59 1841.53,3028.47 2206.53,3028.47 2207.11,3028.59 2207.61,3028.92 2207.94,3029.41 2208.06,3030 2208.06,3603.47 3470,3603.47
VDD_SCAN_FPGA on L3 (split plane): 2157.88,3100.27 2015.94,3100.27 2015.94,3398.74 2015.82,3399.32 2015.49,3399.82 2014.99,3400.15 2014.41,3400.27 741.53,3400.27 741.53,3788.47 2157.88,3788.47
VDDA on L3 (split plane): 5318.47,1801.53 1111.53,1801.53 1111.53,1888.47 5184.84,1888.47 5185.43,1888.59 5185.93,1888.92 5186.26,1889.41 5186.37,1890 5186.37,2296.43 5186.26,2297.02 5185.93,2297.52 5185.43,2297.85 5184.84,2297.96 5184.64,2297.92 5184.44,2297.96 4979.82,2297.96 4979.82,2360.11 5184.47,2360.11 5185.05,2360.22 5185.55,2360.55 5185.88,2361.05 5186,2361.64 5186,2453.47 5318.47,2453.47
VDD_IN on L3 (split plane): 3158.47,2086.53 855,2086.53 854.41,2086.41 853.92,2086.08 853.59,2085.59 853.47,2085 853.47,1016.24 853.59,1015.65 853.92,1015.16 854.41,1014.83 855,1014.71 5113.47,1014.71 5113.47,356.53 2851.09,356.53 2837.11,365.87 2820.89,372.59 2803.68,376.02 2786.12,376.02 2768.91,372.59 2752.69,365.87 2738.7,356.53 1253.07,356.53 1256.02,371.32 1256.02,380.1 1256.02,388.88 1252.59,406.09 1245.87,422.31 1236.12,436.9 1223.71,449.31 1209.12,459.07 1192.9,465.78 1175.69,469.21 1158.13,469.21 1140.92,465.78 1124.7,459.07 1110.11,449.31 1097.7,436.9 1087.94,422.31 1081.23,406.09 1077.8,388.88 1077.8,380.1 1077.8,371.32 1080.75,356.53 416.53,356.53 416.53,2473.47 3158.47,2473.47
VDDA on L3 (split plane): 6679.9,20.1 20.1,20.1 20.1,3879.9 6679.9,3879.9
VDD_LINK_CM1 on L4 (split plane): 5212.72,1911.53 2436.53,1911.53 2436.53,1983.47 5119.06,1983.47 5119.65,1983.59 5120.14,1983.92 5120.47,1984.41 5120.59,1985 5120.59,2290.38 5120.47,2290.96 5120.14,2291.46 5119.65,2291.79 5119.06,2291.91 5087.79,2291.91 5087.79,2307.96 5212.72,2307.96
VDD_LINK_CM1 on L4 (split plane): 5069.57,2276.47 5069.69,2275.89 5070.02,2275.39 5070.52,2275.06 5071.1,2274.94 5097.58,2274.94 5097.58,2259.53 5071.79,2259.53 5071.2,2259.41 5070.71,2259.08 5070.37,2258.59 5070.26,2258 5070.26,2016.53 2495.94,2016.53 2495.94,2103.47 4829.25,2103.47 4829.84,2103.59 4830.34,2103.92 4830.67,2104.41 4830.78,2105 4830.78,2416.11 5069.57,2416.11
VDD_LINK_CM1 on L4 (split plane): 5447.88,1796.53 526.53,1796.53 526.53,1873.47 5304.25,1873.47 5304.84,1873.59 5305.34,1873.92 5305.67,1874.41 5305.78,1875 5305.78,2134.69 5447.88,2134.69
VDD_FPGA_3P3V on L4 (split plane): 3133.47,2236.53 426.53,2236.53 426.53,3838.47 3133.47,3838.47
VDD_LINK_CM1 on L4 (split plane): 6679.9,20.1 20.1,20.1 20.1,3879.9 6679.9,3879.9

## Other copper
TOP:
  rectangle net NetU2_R24: 5007.07,2249.12 5016.24,2258.57
  rectangle net VSS: 4973.61,2249.29 5002.91,2262.99
  rectangle net VSS: 4986.84,2242.59 4996.24,2252.04
  rectangle net VSS: 4960.2,2336.15 4969.46,2345.6
  rectangle net VSS: 4960.21,2296.16 4969.47,2305.56
  rectangle net VSS: 4966.96,2281.65 4982.78,2291.05
  rectangle net VDDA: 5000.34,2325.49 5022.94,2338.96
  rectangle net DVDD: 4986.96,2276.02 5002.91,2285.47
  rectangle net DVDD: 4973.4,2302.81 4996.23,2312.25
  rectangle net DVDD: 4973.4,2329.66 4996.23,2339.11
  rectangle net VSS: 4966.93,2289.27 4996.17,2298.72
  rectangle net VSS: 4960.21,2316.13 4996.2,2325.58
  rectangle net VSS: 4960.21,2356.21 4983.04,2369.98
  rectangle net VSS: 5002.05,2376.41 5009.57,2385.86
  rectangle net NetU2_P2: 5013.68,2396.44 5023.03,2405.89
  rectangle net NetU2_P5: 5013.6,2376.29 5022.96,2385.74
  rectangle net VSS: 4973.57,2388.72 5002.89,2398.13
  rectangle net VSS: 4986.82,2403.02 4996.22,2412.46
  rectangle net VSS: 4973.57,2396.39 5009.57,2405.84
  rectangle net DVDD: 4986.75,2356.38 5009.59,2365.82
  rectangle net VSS: 5047.09,2242.61 5056.49,2252.06
  rectangle net VDD_IO: 5080.48,2249.15 5103.32,2258.6
  rectangle net DVDD: 5040.38,2284.53 5049.78,2293.98
  rectangle net DVDD: 5040.4,2275.89 5063.23,2285.34
  rectangle net VSS: 5083.17,2336.35 5089.89,2345.54
  rectangle net VSS: 5080.67,2316.07 5089.85,2325.52
  rectangle net VSS: 5080.73,2296.01 5089.91,2305.46
  rectangle net VDD_LINK_CM1: 5094.1,2316.27 5103.27,2325.72
  rectangle net VDD_LINK_CM1: 5094.06,2295.93 5103.23,2305.38
  rectangle net VSS: 5083.22,2276.11 5103.42,2285.36
  rectangle net DVDD: 5053.75,2316.05 5076.59,2325.49
  rectangle net VSS: 5053.89,2289.38 5083.23,2303.38
  rectangle net VSS: 5067.23,2276.11 5083.25,2290.1
  rectangle net VSS: 5067.24,2271.24 5076.58,2281.35
  rectangle net DVDD: 5040.32,2365.35 5049.88,2374.8
  rectangle net DVDD: 5040.32,2356.14 5063.16,2365.59
  rectangle net VDD_IO: 5080.69,2396.44 5103.53,2405.89
  rectangle net DVDD: 5053.68,2396.5 5076.51,2405.95
  rectangle net VSS: 5067,2356.32 5089.84,2369.74
  rectangle net VSS: 5053.91,2369.72 5103.39,2383.36
  rectangle net VSS: 4966.87,2348.89 4983.07,2362.66
  rectangle net NetU2_R21: 5007,2269.29 5016.17,2278.74
  rectangle net VSS: 5013.53,2349.34 5022.97,2358.83
  rectangle net VSS: 4966.86,2342.82 5022.97,2352.27
  rectangle net VSS: 5053.92,2329.5 5067.21,2352.25
  rectangle net DVDD: 5080.47,2262.66 5103.3,2272.11
  rectangle net VSS: 5067,2329.52 5083.2,2356.39
  rectangle net VDD_IO: 4946.62,2249.12 4969.45,2258.57
  rectangle net VSS: 5020.31,2249.3 5076.58,2258.55
  rectangle net NetU2_AD11: 4940.14,2336.16 4956.05,2345.61
  rectangle net VDD_LINK_CM0: 4946.81,2316.09 4955.98,2325.54
  rectangle net VDD_LINK_CM0: 4946.82,2296.12 4956.05,2305.56
  rectangle net VSS: 4946.43,2271.07 4982.79,2285.45
  rectangle net VSS: 5027.17,2275.85 5036.4,2285.3
  rectangle net VSS: 5027.14,2329.62 5054.06,2338.82
  rectangle net VDDA: 5000.34,2316.1 5049.8,2325.55
  rectangle net DVDD: 5000.37,2289.42 5049.78,2298.87
  rectangle net NetU2_A11: 5094.07,2336.12 5109.98,2345.57
  rectangle net VSS: 5000.35,2302.88 5083.24,2312.32
  rectangle net VDD_IO: 4946.66,2396.39 4969.5,2405.84
  rectangle net NetU2_AD8: 4940.15,2356.31 4956.06,2365.76
  rectangle net VSS: 5027.12,2392.5 5049.95,2405.85
  rectangle net DVDD: 5027.05,2369.57 5049.88,2379.02
  rectangle net VSS: 5013.53,2356.39 5036.37,2365.84
  rectangle net NetU2_A8: 5094.05,2356.25 5109.96,2365.7
  rectangle net VSS: 4940.15,2369.76 5002.88,2392.48
  rectangle net VSS: 5027.07,2383.05 5103.33,2392.49
  rectangle net VDDA: 5026.96,2342.79 5049.79,2352.24
  rectangle net VSS: 5020.46,2269.2 5036.45,2278.64
  rectangle net VSS: 4946.43,2262.72 5002.91,2272.17
  rectangle net VSS: 5027.19,2257.91 5076.58,2271.95
  region net VSS: 420.81,684.92 cw(c509.92,684.92) 509.92,774.02 cw(c509.92,684.92) 599.02,684.92 cw(c509.92,684.92) 509.92,595.81 cw(c509.92,684.92)
  pour cut-out: 5378,998 5304,998 5304,968 5378,968
L3 (plane layer: these items are gaps in the copper):
  lines w3: 5115.68,2273.64 5115.68,2231.28 3471.53,2231.28 3471.53,1935 1395,1935 1395,2025 3235,2025 3235,2850 1661.53,2850 1661.53,3220 1841.53,3220 1841.53,3030 2206.53,3030 2206.53,3605 3471.53,3605 3471.53,2435 5112.73,2435 5112.73,2390.16 4911.57,2390.16 4911.57,2273.8 5115.68,2273.8 ; 5184.44,2296.43 4978.29,2296.43 4978.29,2361.64 5184.47,2361.64 5184.47,2455 5320,2455 5320,1800 1110,1800 1110,1890 5184.84,1890 5184.84,2296.43 ; 415,355 415,2475 3160,2475 3160,2085 855,2085 855,1016.24 5115,1016.24 5115,355 415,355 ; 740,3398.74 2014.41,3398.74 2014.41,3098.74 2159.41,3098.74 2159.41,3790 740,3790 740,3398.74
L4 (plane layer: these items are gaps in the copper):
  lines w3: 2494.41,2015 2494.41,2105 4829.25,2105 4829.25,2417.64 5071.1,2417.64 5071.1,2276.47 5099.11,2276.47 5099.11,2258 5071.79,2258 5071.79,2015 2495,2015 ; 425,2235 425,3840 3135,3840 3135,2235 425,2235 ; 525,1795 525,1875 5304.25,1875 5304.25,2136.22 5449.41,2136.22 5449.41,1795 525,1795 ; 2435,1910 5214.25,1910 5214.25,2309.49 5086.26,2309.49 5086.26,2290.38 5119.06,2290.38 5119.06,1985 2435,1985 2435,1910

## Silkscreen, mask and mechanical layers (free items; w line width, h text height)
Top Overlay:
  text "FADER2" at 555,245 h31.5
  text "08/14/2018" at 550,165 h31.5
Drill Drawing:
  circle w10: c7132.09,3568.76 r26.67
  circle w10: c7132.09,3568.76 r44.44
  circle w10: c7132.09,2368.76 r44.44
  lines w10: 7087.65,2124.32 7176.54,2124.32 7176.54,2213.2 7087.65,2213.2 7087.65,2124.32 ; 7087.65,2524.32 7176.54,2524.32 7176.54,2613.2 7087.65,2613.2 7087.65,2524.32 ; 7087.65,2768.76 7132.09,2724.32 7176.54,2768.76 7132.09,2813.2 7087.65,2768.76 ; 7087.65,2946.54 7109.87,2946.54 7132.09,2924.32 7154.32,2946.54 7176.54,2946.54 7154.32,2968.76 7176.54,2990.98 7154.32,2990.98 7132.09,3013.2 7109.87,2990.98 7087.65,2990.98 7109.87,2968.76 7087.65,2946.54 ; 7087.65,3124.32 7132.09,3146.54 7176.54,3124.32 7154.32,3168.76 7176.54,3213.2 7132.09,3190.98 7087.65,3213.2 7109.87,3168.76 7087.65,3124.32 ; 7087.65,3346.54 7109.87,3346.54 7109.87,3324.32 7154.32,3324.32 7154.32,3346.54 7176.54,3346.54 7176.54,3390.98 7154.32,3390.98 7154.32,3413.2 7109.87,3413.2 7109.87,3390.98 7087.65,3390.98 7087.65,3346.54 ; 7093.23,318.81 7093.23,341.04 7115.46,363.26 7093.23,385.48 7093.23,407.7 7115.46,407.7 7137.68,385.48 7159.9,407.7 7182.12,407.7 7182.12,385.48 7159.9,363.26 7182.12,341.04 7182.12,318.81 7159.9,318.81 7137.68,341.04 7115.46,318.81 7093.23,318.81 ; 7093.5,846.36 7093.5,868.59 7115.72,890.81 7093.5,913.03 7093.5,935.25 7115.72,935.25 7137.94,913.03 7160.17,935.25 7182.39,935.25 7182.39,913.03 7160.17,890.81 7182.39,868.59 7182.39,846.36 7160.17,846.36 7137.94,868.59 7115.72,846.36 7093.5,846.36 ; 7098.52,1390.48 7098.52,1412.7 7120.75,1434.92 7098.52,1457.14 7098.52,1479.36 7120.75,1479.36 7142.97,1457.14 7165.19,1479.36 7187.41,1479.36 7187.41,1457.14 7165.19,1434.92 7187.41,1412.7 7187.41,1390.48 7165.19,1390.48 7142.97,1412.7 7120.75,1390.48 7098.52,1390.48 ; 7105.43,2142.09 7158.76,2142.09 7158.76,2195.43 7105.43,2195.43 7105.43,2142.09
  lines w15: 7008.97,3664.32 12924.71,3664.32 ; 7014.55,458.81 13556.76,458.81 ; 7014.82,986.36 13557.03,986.36 ; 7019.84,1530.48 13562.05,1530.48 ; 7732.8,2064.32 7732.8,3864.32 ; 7738.39,258.81 7738.39,658.81 ; 7738.65,786.36 7738.65,1186.36 ; 7743.68,1330.48 7743.68,1730.48 ; 8300.67,2064.32 8300.67,3864.32 ; 8306.25,258.81 8306.25,658.81 ; 8306.52,786.36 8306.52,1186.36 ; 8311.54,1330.48 8311.54,1730.48 ; 9699.18,258.81 9699.18,658.81 ; 9699.45,786.36 9699.45,1186.36 ; 9704.47,1330.48 9704.47,1730.48 ; 9840.22,2064.32 9840.22,3864.32 ; 10474.98,258.81 10474.98,658.81 ; 10475.24,786.36 10475.24,1186.36 ; 10480.27,1330.48 10480.27,1730.48 ; 10616.01,2064.32 10616.01,3864.32 ; 12050.52,258.81 12050.52,658.81 ; 12050.78,786.36 12050.78,1186.36 ; 12055.81,1330.48 12055.81,1730.48 ; 12191.55,2064.32 12191.55,3864.32 ; 7008.97,2064.32 12924.71,2064.32 12924.71,3864.32 7008.97,3864.32 7008.97,2064.32 ; 7014.55,258.81 13556.76,258.81 13556.76,658.81 7014.55,658.81 7014.55,258.81 ; 7014.82,786.36 13557.03,786.36 13557.03,1186.36 7014.82,1186.36 7014.82,786.36 ; 7019.84,1330.48 13562.05,1330.48 13562.05,1730.48 7019.84,1730.48 7019.84,1330.48
  text "Symbol" at 7128.97,3724.32 h96
  text "Count" at 7792.8,3724.32 h96
  text "Hole Size" at 8360.67,3724.32 h96
  text "Via/Pad" at 9900.22,3724.32 h96
  text "Drill Layer Pair" at 10676.01,3724.32 h96
  text "Type" at 12251.55,3724.32 h96
  text "29" at 7792.8,3524.32 h80
  text "7,00mil (0,178mm)" at 8360.67,3524.32 h80
  text "Via" at 9900.22,3524.32 h80
  text "TOP - BOT" at 10676.01,3524.32 h80
  text "Through" at 12251.55,3524.32 h80
  text "2" at 7792.8,3324.32 h80
  text "7,87mil (0,200mm)" at 8360.67,3324.32 h80
  text "Via" at 9900.22,3324.32 h80
  text "TOP - BOT" at 10676.01,3324.32 h80
  text "Through" at 12251.55,3324.32 h80
  text "49" at 7792.8,3124.32 h80
  text "10,00mil (0,254mm)" at 8360.67,3124.32 h80
  text "Via" at 9900.22,3124.32 h80
  text "TOP - BOT" at 10676.01,3124.32 h80
  text "Through" at 12251.55,3124.32 h80
  text "597" at 7792.8,2924.32 h80
  text "20,00mil (0,508mm)" at 8360.67,2924.32 h80
  text "(Mixed)" at 9900.22,2924.32 h80
  text "TOP - BOT" at 10676.01,2924.32 h80
  text "Through" at 12251.55,2924.32 h80
  text "71" at 7792.8,2724.32 h80
  text "28,00mil (0,711mm)" at 8360.67,2724.32 h80
  text "Via" at 9900.22,2724.32 h80
  text "TOP - BOT" at 10676.01,2724.32 h80
  text "Through" at 12251.55,2724.32 h80
  text "82" at 7792.8,2524.32 h80
  text "35,43mil (0,900mm)" at 8360.67,2524.32 h80
  text "Pad" at 9900.22,2524.32 h80
  text "TOP - BOT" at 10676.01,2524.32 h80
  text "Through" at 12251.55,2524.32 h80
  text "128" at 7792.8,2324.32 h80
  text "67,00mil (1,702mm)" at 8360.67,2324.32 h80
  text "Pad" at 9900.22,2324.32 h80
  text "TOP - BOT" at 10676.01,2324.32 h80
  text "Through" at 12251.55,2324.32 h80
  text "4" at 7792.8,2124.32 h80
  text "150,00mil (3,810mm)" at 8360.67,2124.32 h80
  text "Pad" at 9900.22,2124.32 h80
  text "TOP - BOT" at 10676.01,2124.32 h80
  text "Through" at 12251.55,2124.32 h80
  text "Symbol" at 7139.84,1590.48 h96
  text "Count" at 7803.68,1590.48 h96
  text "Hole Size" at 8371.54,1590.48 h96
  text "Via/Pad" at 9764.47,1590.48 h96
  text "Drill Layer Pair" at 10540.27,1590.48 h96
  text "Type" at 12115.81,1590.48 h96
  text "60" at 7803.68,1390.48 h80
  text "6,00mil (0,152mm)" at 8371.54,1390.48 h80
  text "Via" at 9764.47,1390.48 h80
  text "TOP - L2" at 10540.27,1390.48 h80
  text "Capped-and-plated" at 12115.81,1390.48 h80
  text "Symbol" at 7134.82,1046.36 h96
  text "Count" at 7798.65,1046.36 h96
  text "Hole Size" at 8366.52,1046.36 h96
  text "Via/Pad" at 9759.45,1046.36 h96
  text "Drill Layer Pair" at 10535.24,1046.36 h96
  text "Type" at 12110.78,1046.36 h96
  text "60" at 7798.65,846.36 h80
  text "6,00mil (0,152mm)" at 8366.52,846.36 h80
  text "Via" at 9759.45,846.36 h80
  text "L2 - L5" at 10535.24,846.36 h80
  text "Capped-and-plated" at 12110.78,846.36 h80
  text "Symbol" at 7134.55,518.81 h96
  text "Count" at 7798.39,518.81 h96
  text "Hole Size" at 8366.25,518.81 h96
  text "Via/Pad" at 9759.18,518.81 h96
  text "Drill Layer Pair" at 10534.98,518.81 h96
  text "Type" at 12110.52,518.81 h96
  text "60" at 7798.39,318.81 h80
  text "6,00mil (0,152mm)" at 8366.25,318.81 h80
  text "Via" at 9759.18,318.81 h80
  text "L5 - BOT" at 10534.98,318.81 h80
  text "Capped-and-plated" at 12110.52,318.81 h80

## Dimensions
0,0 to -50,3900 on Drill Guide
0,0 to 6700,0 on Drill Guide